# Altium PCB PCB2.pcbdoc (part 1 of 2)
Units mil, origin at the board's own origin, x right, y up, seen from the top; angles counter-clockwise.
Board outline 1968.5 x 1778.5 mil, 4 copper layers (Top Layer, Inner1, Inner2, Bottom Layer), stack 62.447 mil thick; 56 components, 57 nets, 242 pads, 74 vias.
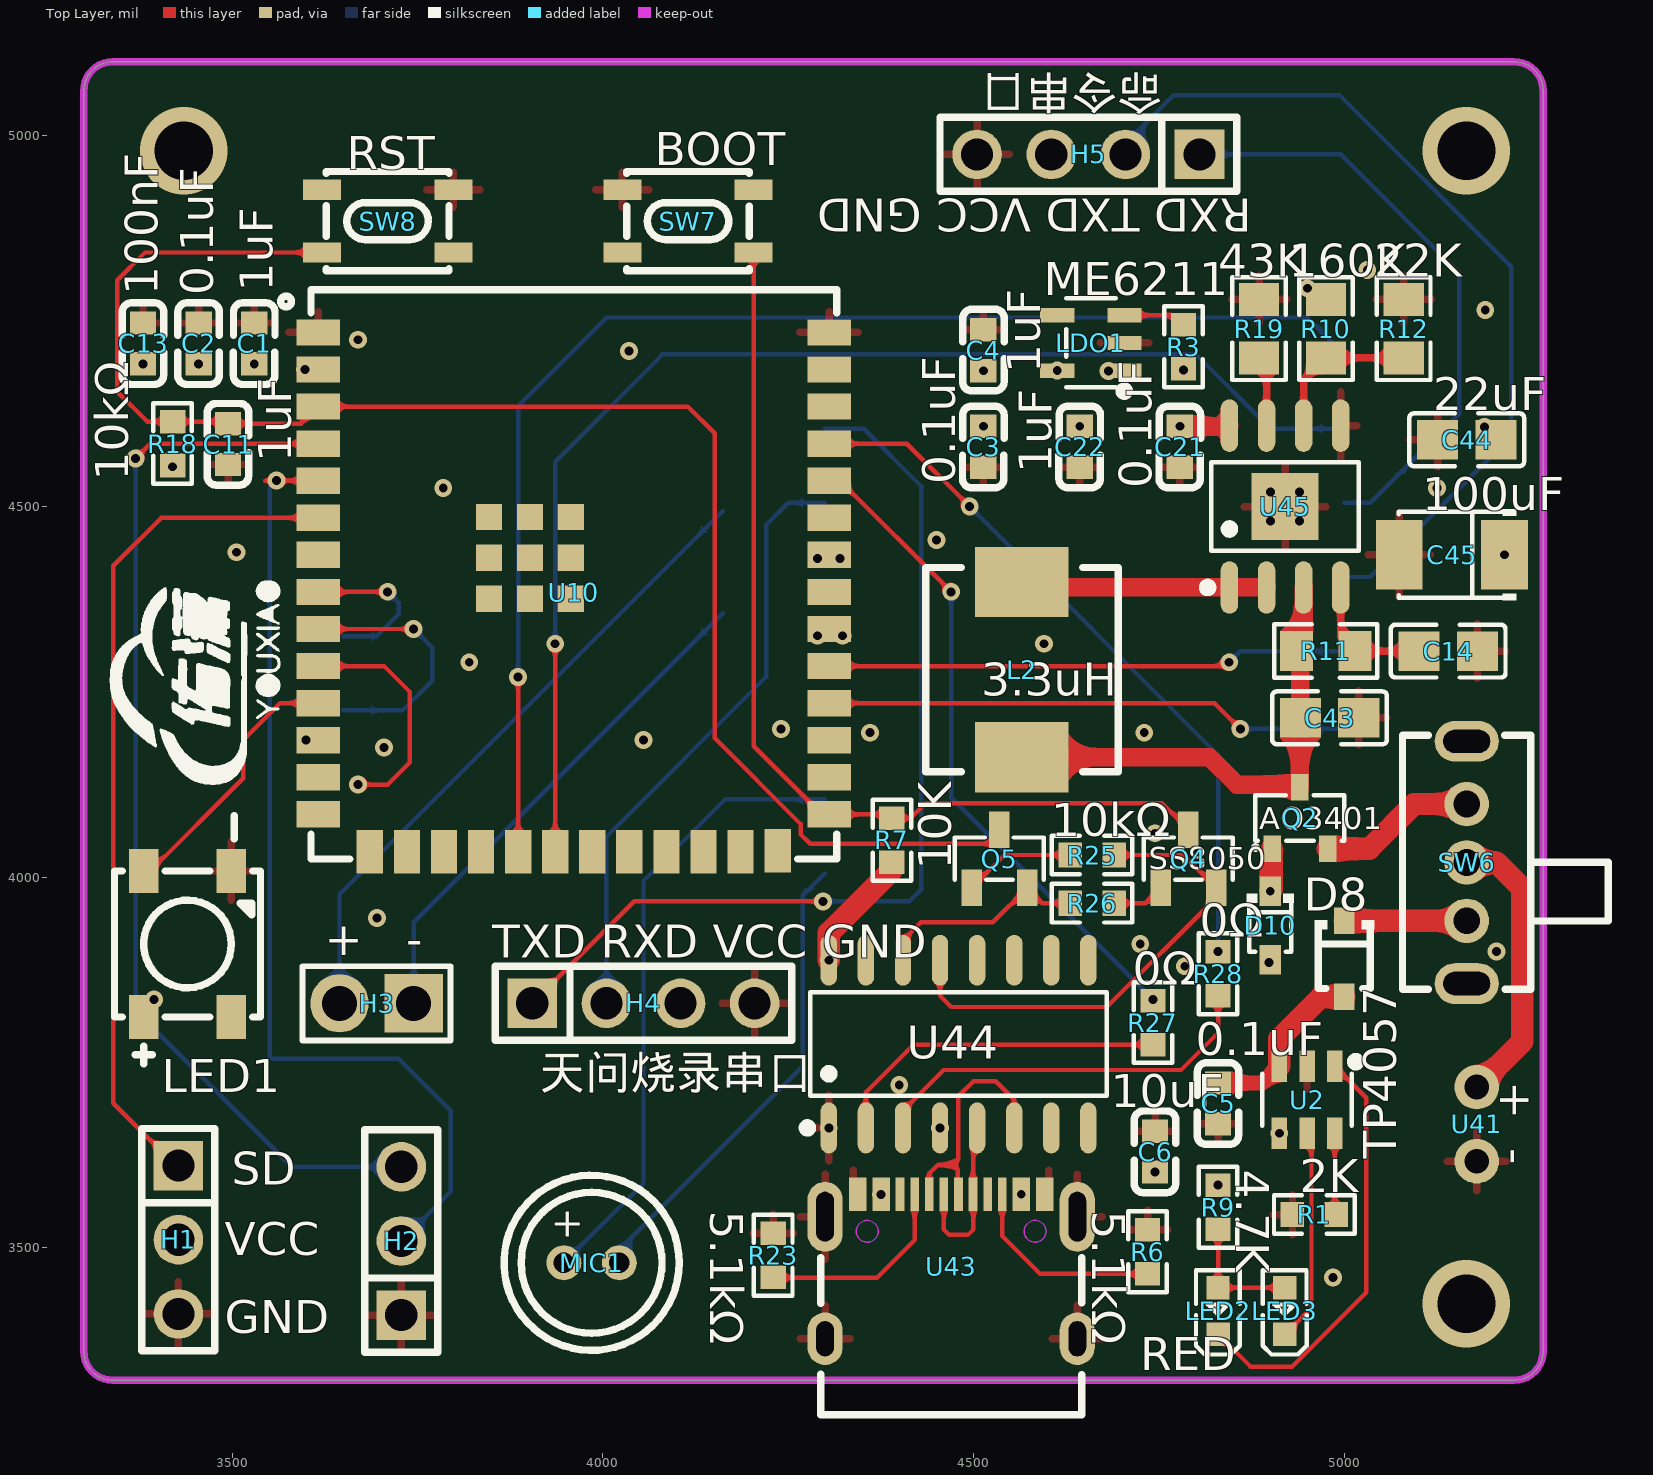
[diagram p0: Top Layer view]
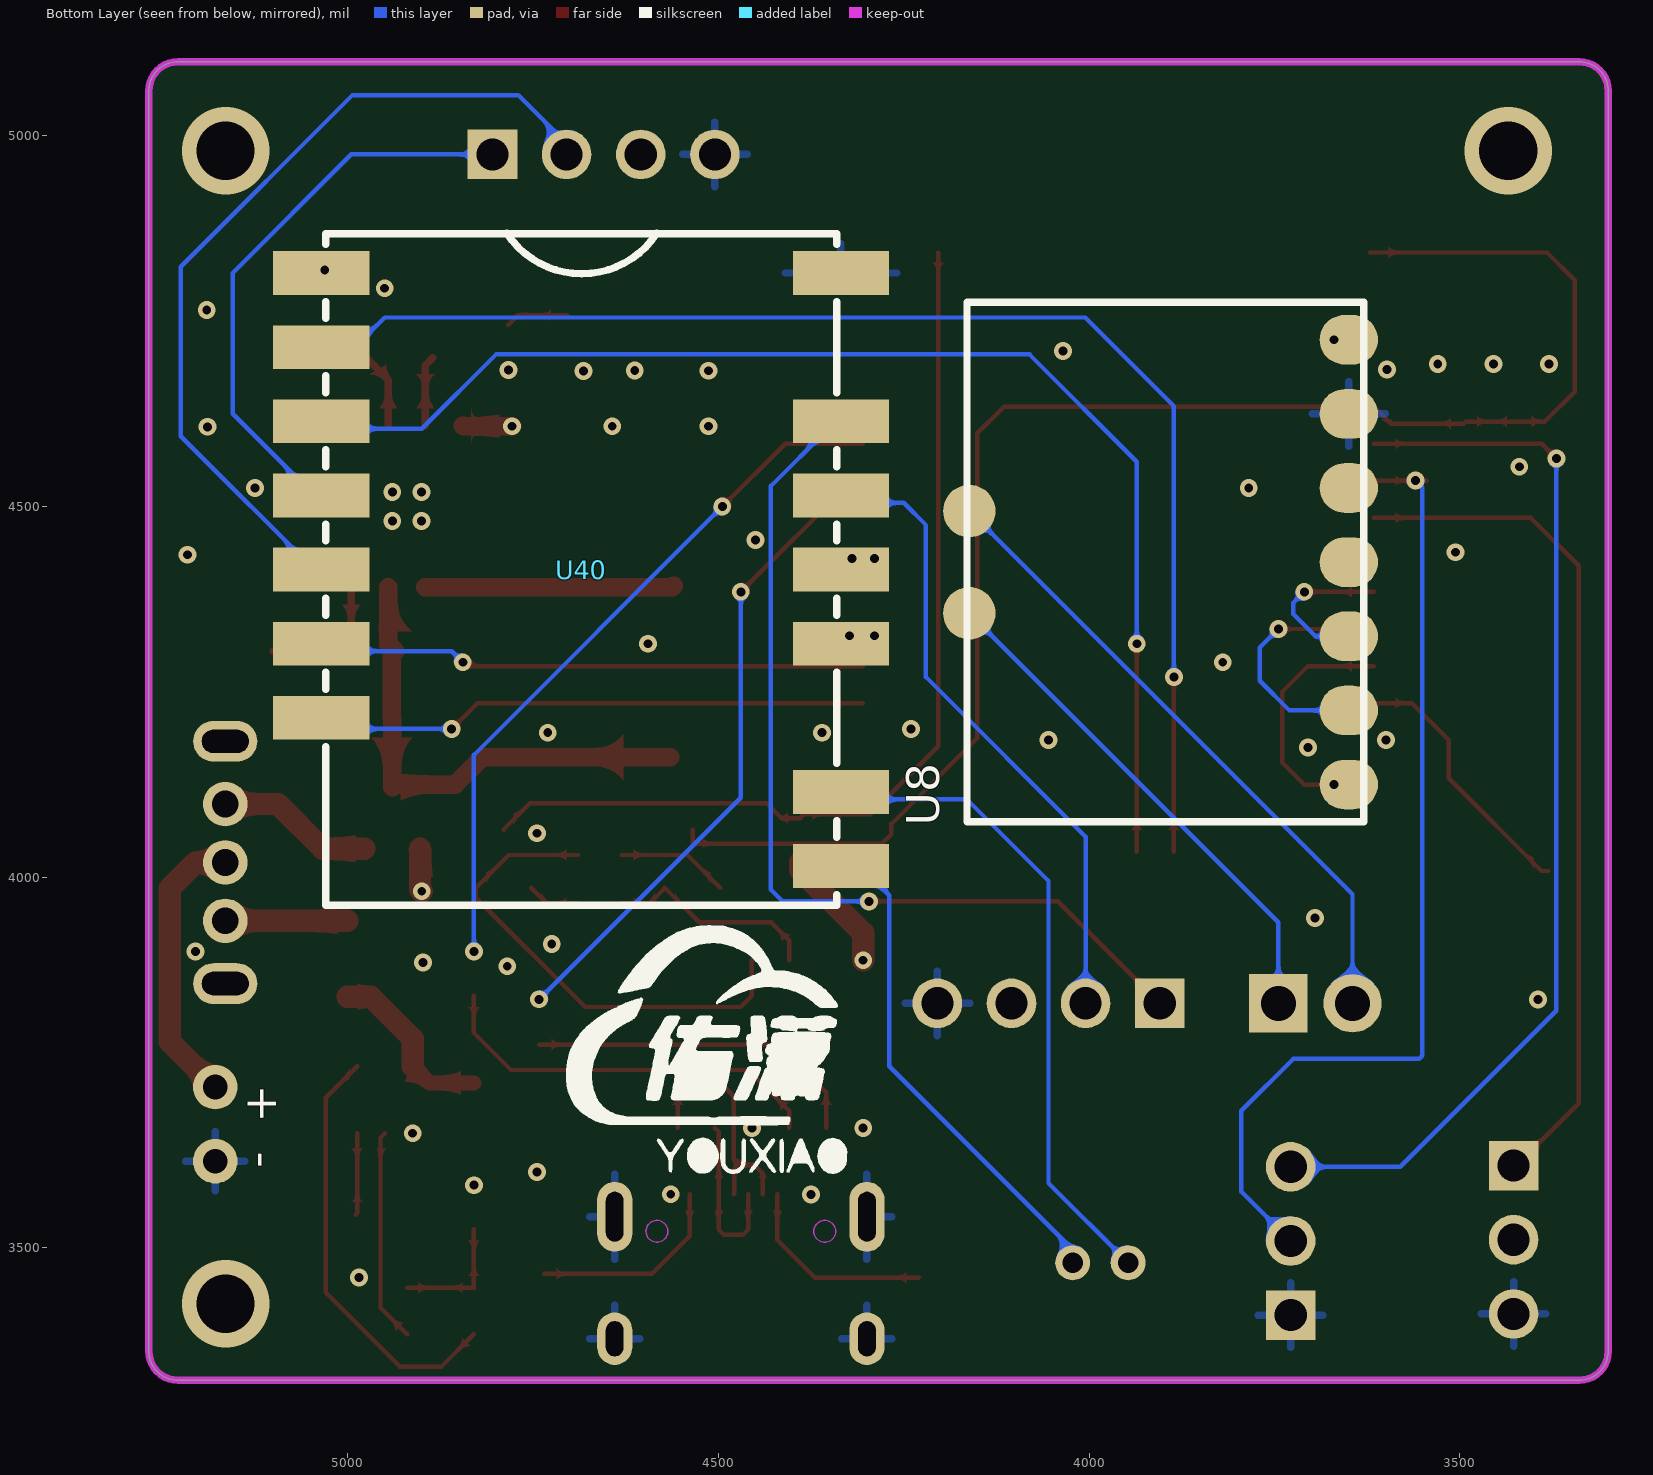
[diagram p1: Bottom Layer view, seen from below]
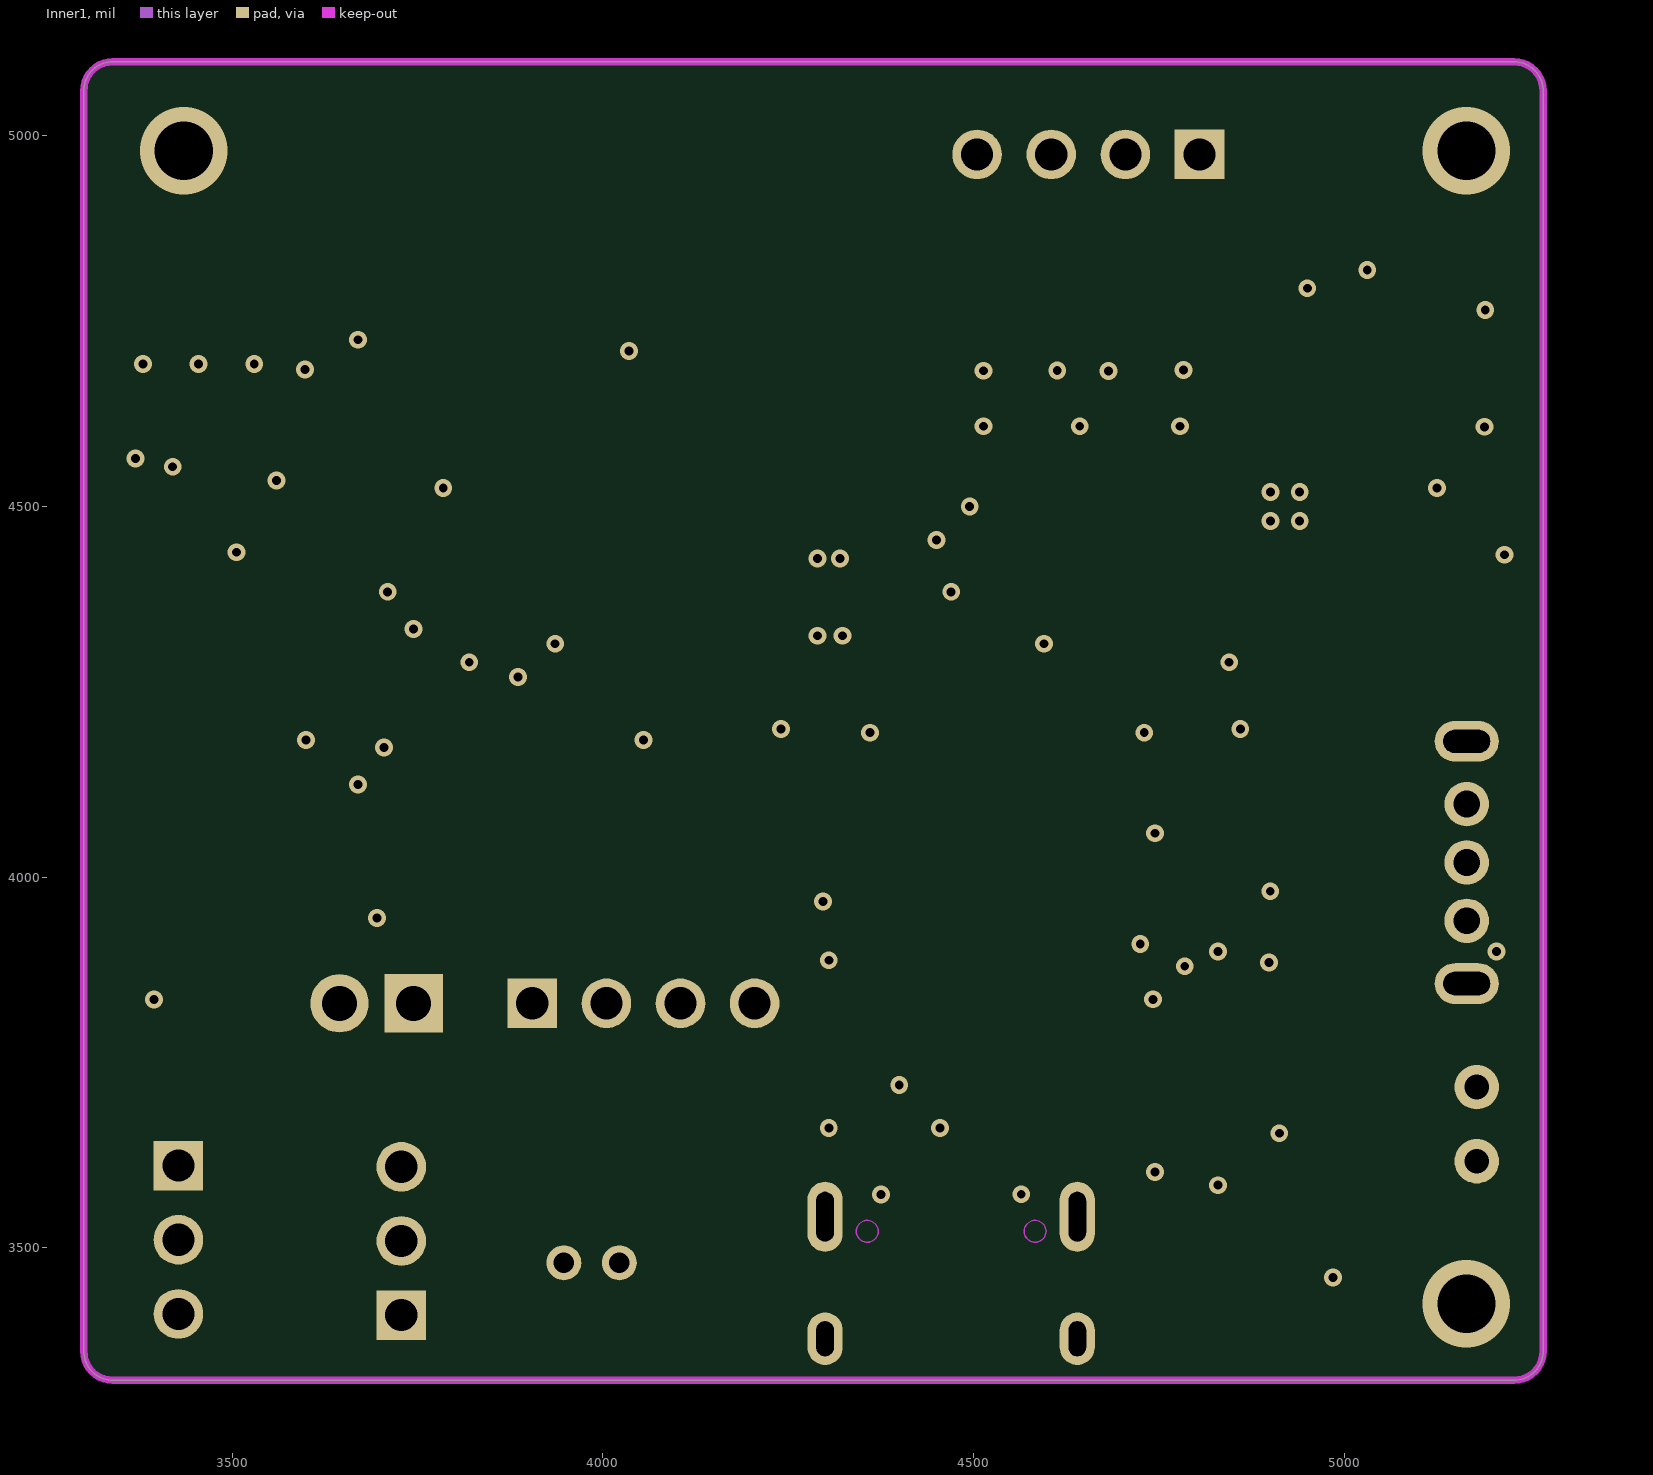
[diagram p2: Inner1]
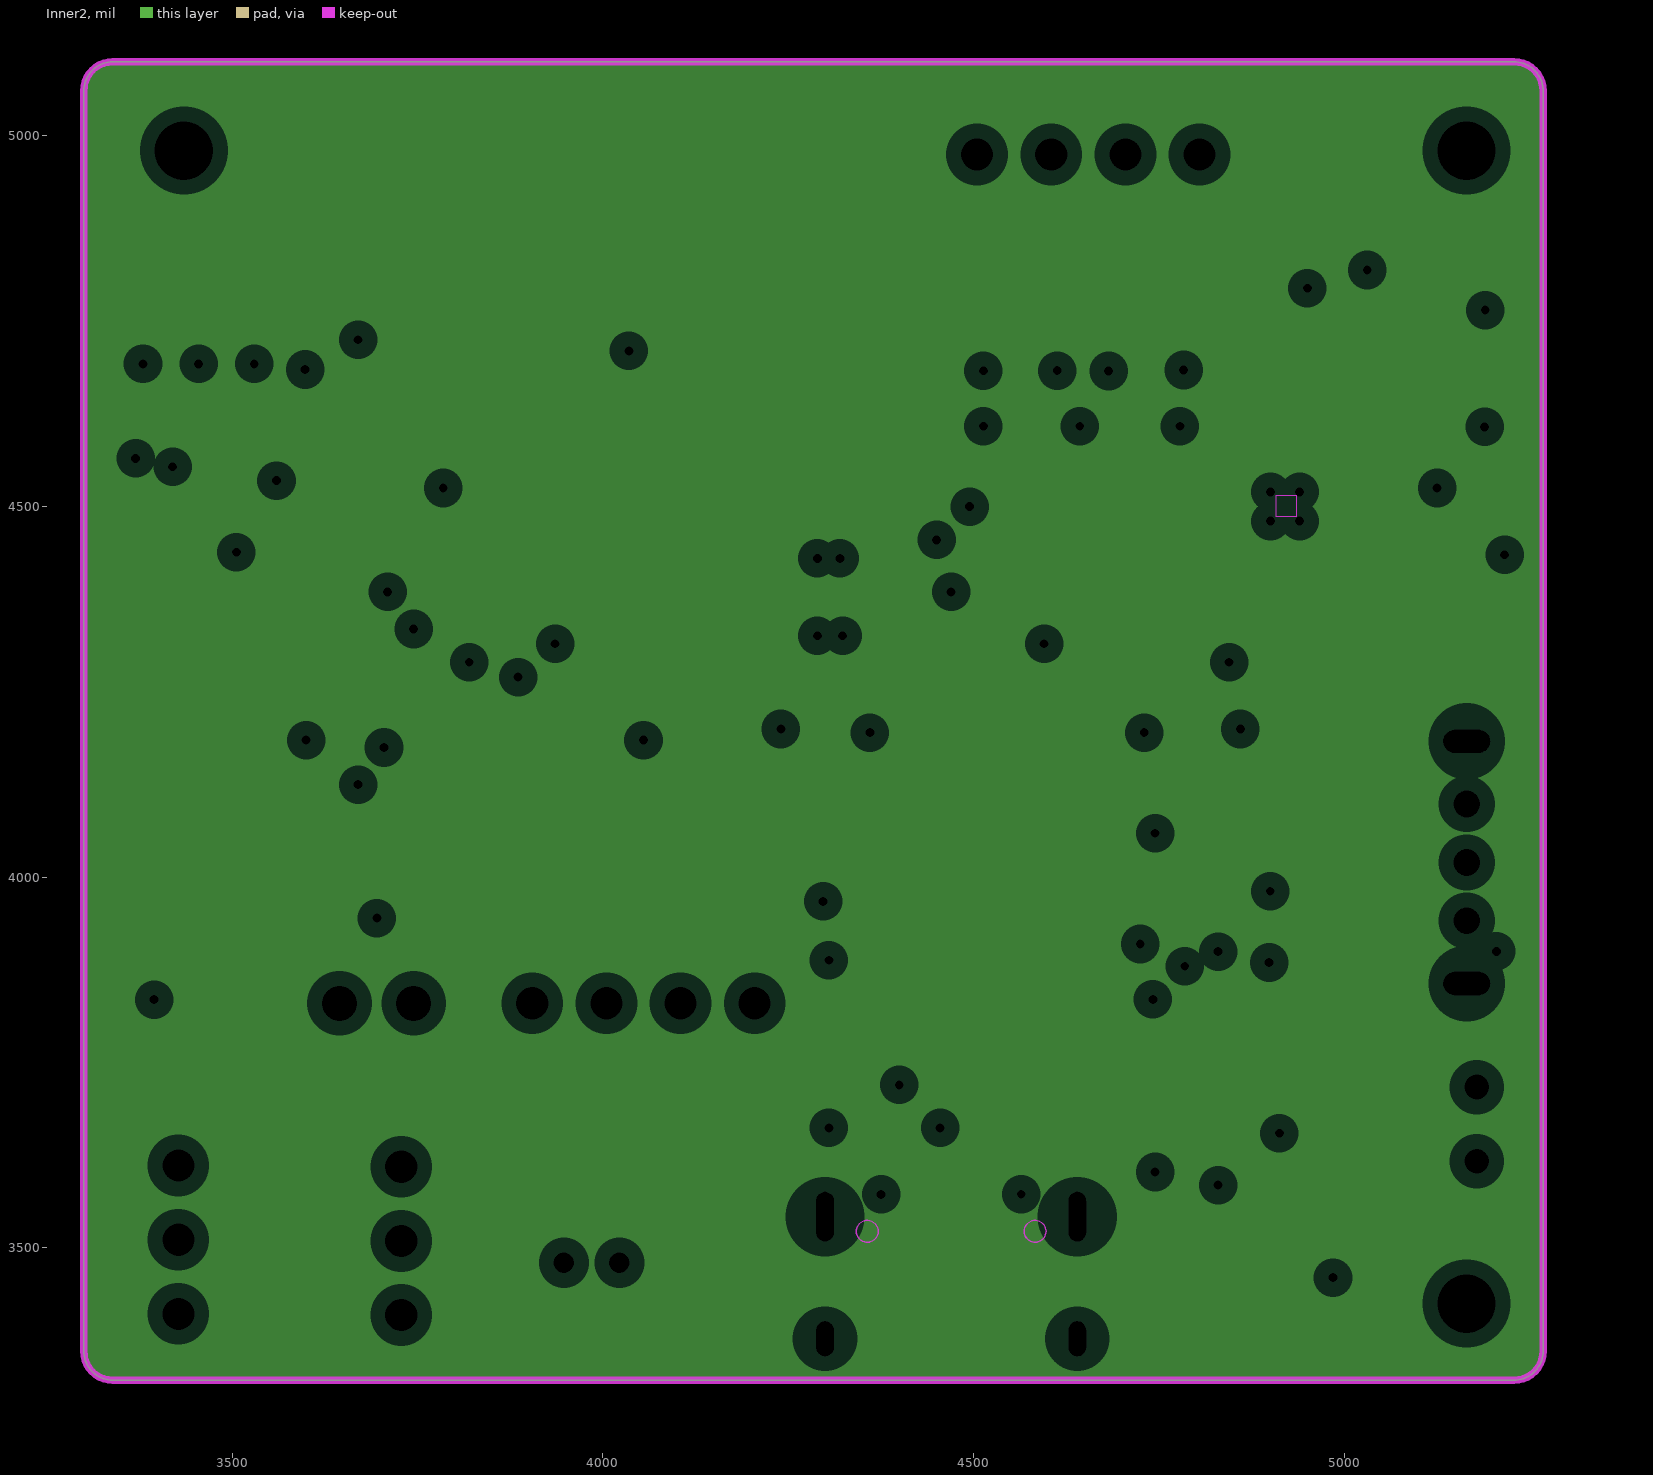
[diagram p3: Inner2, clearances drawn from the general rule]

## Layer stack, top to bottom
Top Layer: signal copper 1.378
Dielectric1: surface 8.283, 7628 RC49% 8.6mil, Dk 0
Inner1: signal copper 0.598
Dielectric2: surface 41.929, 1.1mm H/HOZ Copper, Dk 0
Inner2: plane copper 0.598
Dielectric3: surface 8.283, 7628 RC49% 8.6mil, Dk 0
Bottom Layer: signal copper 1.378

## Board outline
3338.97,5100 5228.73,5100 cw(c5228.73,5060.63) 5268.1,5060.63 5268.1,3360.87 cw(c5228.73,3360.87) 5228.73,3321.5 3338.97,3321.5 cw(c3338.97,3360.87) 3299.6,3360.87 3299.6,5060.63 cw(c3338.97,5060.63)

## Design rules (kind name [scope] priority, off if disabled: settings)
BoardOutlineClearance copperThickness1oz [All] p0: genericclearance=10 ignorepadtopadclearanceinfootprint=FALSE except(0: Arc-SplitContinuation Track-SplitContinuation SMDPad-SplitContinuation THPad-SplitContinuation Via-SplitContinuation Fill-SplitContinuation Poly-SplitContinuation Region-SplitContinuation Text-SplitContinuation)
BoardOutlineClearance copperThickness2oz [All] p0: genericclearance=10 ignorepadtopadclearanceinfootprint=FALSE except(0: Arc-SplitContinuation Track-SplitContinuation SMDPad-SplitContinuation THPad-SplitContinuation Via-SplitContinuation Fill-SplitContinuation Poly-SplitContinuation Region-SplitContinuation Text-SplitContinuation)
BoardOutlineClearance Plane_innerPlane [All] p0: genericclearance=10 ignorepadtopadclearanceinfootprint=FALSE except(0: Arc-SplitContinuation Track-SplitContinuation SMDPad-SplitContinuation THPad-SplitContinuation Via-SplitContinuation Fill-SplitContinuation Poly-SplitContinuation Region-SplitContinuation Text-SplitContinuation)
BoardOutlineClearance Copper_copperRegion [All] p0: genericclearance=10 ignorepadtopadclearanceinfootprint=FALSE except(0: Arc-SplitContinuation Track-SplitContinuation SMDPad-SplitContinuation THPad-SplitContinuation Via-SplitContinuation Fill-SplitContinuation Poly-SplitContinuation Region-SplitContinuation Text-SplitContinuation)
BoardOutlineClearance otherClearance [All] p0: genericclearance=10 ignorepadtopadclearanceinfootprint=FALSE except(0: Arc-SplitContinuation Track-SplitContinuation SMDPad-SplitContinuation THPad-SplitContinuation Via-SplitContinuation Fill-SplitContinuation Poly-SplitContinuation Region-SplitContinuation Text-SplitContinuation)
Clearance copperThickness1oz [All] p1: gap=7 ignorepadtopadclearanceinfootprint=FALSE
Clearance copperThickness2oz [All] p1: gap=7 ignorepadtopadclearanceinfootprint=FALSE
Clearance Plane_innerPlane [All] p1: gap=7 ignorepadtopadclearanceinfootprint=FALSE
Clearance Copper_copperRegion [All] p1: gap=7 ignorepadtopadclearanceinfootprint=FALSE
Clearance otherClearance [All] p1: gap=7 ignorepadtopadclearanceinfootprint=FALSE
DiffPairsRouting differentialPair [All] p1: maxuncoupledlength=10 minlimit=6 maxlimit=Infinity mostfreqgap=6 toplayer_minwidth=5 toplayer_prefwidth=10 toplayer_maxwidth=100 bottomlayer_minwidth=5 bottomlayer_prefwidth=10 bottomlayer_maxwidth=100 midlayer1_minwidth=5 midlayer1_prefwidth=10 midlayer1_maxwidth=100
PasteMaskExpansion pasteMaskExpansion [All] p1: expansion=0
PlaneConnect innerPlane [All] p1: planeconnectstyle=Relief reliefexpansion=20 reliefentries=4 reliefconductorwidth=10 reliefairgap=10
PolygonConnect copperRegion [All] p1: connectstyle=Relief reliefentries=4 reliefconductorwidth=10 polygonreliefangle="90 Angle" airgapwidth=10
RoutingVias viaSize [All] p1: viastyle="Through Hole" holewidth=12.0078 minholewidth=11.811 maxholewidth=248.0314 width=12.0078 minwidth=11.811 maxwidth=248.0314
SolderMaskExpansion solderMaskExpansion [IsVia] p1: useseparateexpansions=TRUE expansion=-1000 expansionbottom=-1000
SolderMaskExpansion solderMaskExpansion [All] p2: useseparateexpansions=TRUE expansion=2 expansionbottom=2
Width copperThickness1oz [All] p1: maxlimit=100 minlimit=5 preferedwidth=10
Width copperThickness2oz [All] p1: maxlimit=100 minlimit=8 preferedwidth=10

## Components (designator, comment, footprint, x,y, rotation, side; value= is the part's Value field where it differs from the comment)
C1 "1uF" C0603#1 3529.61,4720 r90 top
C2 "0.1uF" C0603#1 3454.61,4720 r90 top
C3 "0.1uF" C0603#1 4513.07,4580.7 r90 top
C4 "1uF" C0603#1 4513.07,4710.7 r270 top
C5 "0.1uF" C0603#1 4829.61,3695 r90 top
C6 "10uF" C0603#1 4744.61,3630 r90 top
C11 "1uF" C0603#1 3494.29,4584.32 r90 top
C13 "100nF" C0603#1 3379.61,4720 r90 top
C14 "1uF" C0603#2 5140,4305 r0 top
C21 "0.1uF" C0603#1 4778.07,4580.7 r90 top
C22 "1uF" C0603#1 4643.07,4580.7 r90 top
C43 "1uF" C0603#2 4980,4215 r180 top
C44 "22uF" C0603#2 5165,4590 r0 top
C45 "100uF" CAP-SMD_L3.5-W2.8 5145,4435 r0 top
D8 "1N5819WS" SOD-323_L1.6-W1.3-LS2.7-RD 5000,3890 r270 top
D10 "1N5819WS" SOD-323_L1.8-W1.3-LS2.5-RD 4900,3935 r270 top
H1 "PZ254V-11-03P" HDR-TH_3P-P2.54-V-M 3427.28,3511.12 r270 top
H2 "PZ254V-11-03P" HDR-TH_3P-P2.54-V-M 3727.98,3509.47 r90 top
H3 "PZ254V-11-02P" HDR-TH_2P-P2.54-V-M 3694.61,3830 r180 top
H4 "PZ254V-11-04P" HDR-TH_4P-P2.54-V-M 4054.61,3830 r0 top
H5 "PZ254V-11-04P" HDR-TH_4P-P2.54-V-M 4654.61,4975 r180 top
L2 "3.3uH" IND-SMD_L7.0-W6.6 4565,4280 r90 top
LDO1 "ME6211" SOT-23-5_L3.0-W1.7-P0.95-LS2.8-BL 4658.07,4720.7 r90 top
LED1 "XL-5050RGBC-WS2812B" LED-SMD_4P-L5.0-W5.0-BL_XL-5050RGBC 3439.61,3910 r0 top
LED2 "RED" LED0603-RD_RED 4829.61,3415 r90 top
LED3 "NCD0603R1" LED0603-RD_RED 4919.61,3415 r90 top
MIC1 "GMI6050P-36db" MIC-TH_BD6.0-P1.90-D0.4-L-FD_GMI6050P-2CXXDB 3984.61,3480 r0 top
Q2 "AO3401" SOT-23-3_L2.9-W1.4-P1.90-LS2.6-BR 4940,4080 r270 top
Q4 "SS8050" SOT-23-3_L2.9-W1.3-P1.90-LS2.4-BR 4789.61,4025 r270 top
Q5 "SS8050" SOT-23-3_L2.9-W1.3-P1.90-LS2.4-BR 4534.61,4025 r270 top
R1 "2K" R0603#1 4959.61,3545 r0 top
R3 "5.1K" R0603#1 4783.07,4715.7 r90 top
R6 "5.1kΩ" R0603#1 4734.61,3495 r90 top
R7 "10K" R0603#1 4389.61,4050 r270 top
R9 "4.7K" R0603#1 4829.61,3555 r90 top
R10 "160K" R0603#2 4975,4740 r90 top
R11 "10kΩ" R0603#2 4975,4305 r180 top
R12 "22K" R0603#2 5080,4740 r90 top
R18 "10kΩ" R0603#1 3419.61,4585 r270 top
R19 "43K" R0603#2 4885,4740 r90 top
R23 "5.1kΩ" R0603#1 4229.61,3490 r270 top
R25 "10kΩ" R0603#1 4659.61,4030 r0 top
R26 "10kΩ" R0603#1 4659.61,3965 r180 top
R27 "0Ω" R0603#1 4741.69,3804.04 r90 top
R28 "0Ω" R0603#1 4829.61,3870 r90 top
SW6 "SK12D07VG4" SW-TH_SK12D07VG4 5165,4020 r90 top
SW7 "TS-KG89S-AT25F" SW-SMD_4P-L4.2-W3.3-P2.15-LS5.1 4114.61,4885 r180 top
SW8 "TS-KG89S-AT25F" SW-SMD_4P-L4.2-W3.3-P2.15-LS5.1 3709.61,4885 r0 top
U2 "TP4057" SOT-23-6_L2.9-W1.6-P0.95-LS2.8-BL 4949.61,3700 r180 top
U8 "" MAX98357moudle 4009.61,4425 r90 bottom
U10 "ESP32-S3-WROOM-1U-N16R8" WIRELM-SMD_ESP32-S3-WROOM-1U 3960.55,4384.65 r0 top
U40 "ASRPRO-core" COMM-SMD_ASRPRO-CORE-V1.1 4685,4415 r180 bottom
U41 "" 1*2-2.54单排针 5178.51,3717 r270 top
U43 "24018-UCAF001-A" TYPE-C-USB-SMD_CF003 4469.61,3475 r0 top
U44 "CH340C" SOP-16_L10.0-W3.9-P1.27-LS6.0-BL 4479.61,3775 r0 top
U45 "FP6276BXR-G1" SOP-8_L4.9-W3.9-P1.27-LS6.0-BL-EP 4920,4500 r0 top

## Footprints (in the part's own frame and the unit in brackets; to place one, negate y for a bottom-side part, rotate by r counter-clockwise, add the part's x,y. Pads: shape width x height; smd on the part's side, far side on the other; paste and mask are expansions set on the pad)
1*2-2.54单排针 [mil]
  round 60 hole 33.46: 1(0,0) 2(100,0)
C0603#1 [mm]
  rect 0.8x0.9 smd: 1(-0.7,0) 2(0.7,0)
  silkscreen extent -1.41,-0.71 1.39,0.72
C0603#2 [mm]
  rect 1.41x1.35 smd paste-100 mask+0.051: 1(-1,0) 2(1,0)
  silkscreen extent -1.96,-0.9 1.96,0.9
CAP-SMD_L3.5-W2.8 [mil]
  rect 63.29x93.54 smd: 1(71.02,0) 2(-71.02,0)
  silkscreen extent -72,-61 87,61
COMM-SMD_ASRPRO-CORE-V1.1 [mm]
  rect 3.3x1.5 smd: 1(-8.9,10.16) 2(-8.9,7.62) 3(-8.9,5.08) 4(-8.9,2.54) 5(-8.9,0) 6(-8.9,-2.54) 7(-8.9,-5.08) 10(8.9,-10.16) 11(8.9,-7.62) 13(8.9,-2.54) 14(8.9,0) 15(8.9,2.54) 16(8.9,5.08) 18(8.9,10.16)
  silkscreen extent -8.75,-11.5 8.75,11.52
HDR-TH_2P-P2.54-V-M [mm]
  rect 2x2 hole 1.2: 1(-1.27,0)
  round 2 hole 1.2: 2(1.27,0)
  silkscreen extent -2.54,-1.27 2.54,1.27
HDR-TH_3P-P2.54-V-M [mm]
  rect 1.7x1.7 hole 1.1: 1(-2.54,0)
  round 1.7 hole 1.1: 2(0,0) 3(2.54,0)
  silkscreen extent -3.81,-1.25 3.81,1.25
HDR-TH_4P-P2.54-V-M [mm]
  rect 1.7x1.7 hole 1.1: 1(-3.81,0)
  round 1.7 hole 1.1: 2(-1.27,0) 3(1.27,0) 4(3.81,0)
  silkscreen extent -5.08,-1.27 5.08,1.27
IND-SMD_L7.0-W6.6 [mm]
  rect 2.4x3.2 smd: 1(-3,0) 2(3,0)
  silkscreen extent -3.5,-3.3 3.5,3.3
LED0603-RD_RED [mm]
  rect 0.8x0.8 smd: 1(-0.8,-0.003) 2(0.8,0.003)
  silkscreen extent -1.49,-0.75 1.39,0.76
LED-SMD_4P-L5.0-W5.0-BL_XL-5050RGBC [mm]
  rect 1x1.5 smd: 1(-1.5,-2.5) 2(1.5,-2.5) 3(1.5,2.5) 4(-1.5,2.5)
  silkscreen extent -2.5,-4.1 2.5,4.4
MAX98357moudle [mm]
  oval 1.7x2 smd: 1(-7.62,-9.144) 2(-5.08,-9.144) 3(-2.54,-9.144) 4(0,-9.144) 5(2.54,-9.144) 6(5.08,-9.144) 7(7.62,-9.144)
  round 1.8 smd: 8(-1.75,3.856) 9(1.75,3.856)
  silkscreen extent -8.9,-9.66 8.9,3.94
MIC-TH_BD6.0-P1.90-D0.4-L-FD_GMI6050P-2CXXDB [mm]
  round 1.2 hole 0.7: 1(-0.95,0) 2(0.95,0)
  silkscreen extent -3,-3 3,3
R0603#1 [mil]
  rect 31.75x34.02 smd paste-3937.01 mask+2: 1(-29.66,0) 2(29.66,0)
  silkscreen extent -55,-26 55,26
R0603#2 [mil]
  rect 44.59x54.21 smd paste-3937.01 mask+2: 1(-39.37,0) 2(39.37,0)
  silkscreen extent -69,-36 69,36
SOD-323_L1.6-W1.3-LS2.7-RD [mm]
  rect 0.9x0.7 smd paste+0 mask+0.05: 1(-1.3,0) 2(1.3,0)
  silkscreen extent -1.32,-1.02 1.02,1.02
SOD-323_L1.8-W1.3-LS2.5-RD [mm]
  rect 1x0.75 smd: 1(-1.173,0) 2(1.173,0)
  silkscreen extent -1.08,-0.8 0.9,0.8
SOP-8_L4.9-W3.9-P1.27-LS6.0-BL-EP [mm]
  oval 0.6x1.8 smd: 1(-1.905,-2.772) 2(-0.635,-2.772) 3(0.635,-2.772) 4(1.905,-2.772) 5(1.905,2.772) 6(0.635,2.772) 7(-0.635,2.772) 8(-1.905,2.772)
  rect 2.29x2.29 smd: 9(0,0)
  silkscreen extent -2.8,-2.92 2.53,1.52
SOP-16_L10.0-W3.9-P1.27-LS6.0-BL [mm]
  oval 0.56x1.745 smd paste+0 mask+0.051: 1(-4.445,-2.872) 2(-3.175,-2.872) 3(-1.905,-2.872) 4(-0.635,-2.872) 5(0.635,-2.872) 6(1.905,-2.872) 7(3.175,-2.872) 8(4.445,-2.872) 9(4.445,2.872) 10(3.175,2.872) 11(1.905,2.872) 12(0.635,2.872) 13(-0.635,2.872) 14(-1.905,2.872) 15(-3.175,2.872) 16(-4.445,2.872)
  silkscreen extent -5.33,-3.02 5.08,1.77
SOT-23-3_L2.9-W1.3-P1.90-LS2.4-BR [mm]
  rect 1.25x0.7 smd: 1(1,-0.95) 2(1,0.95) 3(-1,0)
  silkscreen extent -0.73,-1.53 0.73,1.53
SOT-23-3_L2.9-W1.4-P1.90-LS2.6-BR [mm]
  rect 0.91x0.6 smd: 1(1.055,-0.955) 2(1.055,0.955) 3(-1.055,0)
  silkscreen extent -0.78,-1.6 1.09,1.53
SOT-23-5_L3.0-W1.7-P0.95-LS2.8-BL [mm]
  rect 0.49x1.157 smd: 1(-0.95,-1.154) 2(0,-1.154) 3(0.95,-1.154)
  rect 0.49x1.175 smd: 4(0.95,1.154) 5(-0.95,1.154)
  silkscreen extent -1.8,-1.29 1.53,0.85
SOT-23-6_L2.9-W1.6-P0.95-LS2.8-BL [mil]
  rect 20.95x42.2 smd: 1(-37.4,-45.24) 2(0,-45.24) 3(37.4,-45.24) 4(37.4,45.24) 5(0,45.24) 6(-37.4,45.24)
  silkscreen extent -72,-57 61,35
SW-SMD_4P-L4.2-W3.3-P2.15-LS5.1 [mm]
  rect 1.3x0.7 smd: 1(-2.25,1.075) 2(2.25,1.075) 3(-2.25,-1.075) 4(2.25,-1.075)
  silkscreen extent -2.1,-1.7 2.1,1.7
SW-TH_SK12D07VG4 [mil]
  round 60 hole 36 paste+0 mask+1.97: 1(-78.74,0) 2(0,0) 3(78.74,0)
  oval 55.12x86.61 hole 31.5 slot 62.99 at 90 deg paste+0 mask+1.97: 4(163.38,0) 5(-163.39,0)
  silkscreen extent -171,-191 171,87
TYPE-C-USB-SMD_CF003 [mm]
  oval 1.2x2.4 hole 0.6 slot 1.7 at 90 deg paste+0 mask+0.05: 17(4.32,1.705) 20(-4.32,1.705)
  oval 1.2x1.8 hole 0.6 slot 1.2 at 90 deg paste+0 mask+0.05: 18(4.32,-2.475) 19(-4.32,-2.475)
  rect 0.3x1.14 smd paste-100 mask+0.05: A1(-3.35,2.474) A4(-2.55,2.471) A5(-1.25,2.475) A6(-0.25,2.475) A7(0.25,2.474) A8(1.25,2.475) A9(2.55,2.475) A12(3.35,2.475) B1(3.05,2.475) B4(2.25,2.475) B5(1.75,2.475) B6(0.75,2.475) B7(-0.75,2.474) B8(-1.75,2.475) B9(-2.25,2.471) B12(-3.05,2.474)
  Board Outline Layer circle w0.003: c-2.875,1.205 r0.375
  Board Outline Layer circle w0.003: c2.875,1.205 r0.375
  Board Outline Layer region: -2.5,1.205 -2.537,1.042 -2.641,0.912 -2.792,0.839 -2.958,0.839 -3.109,0.912 -3.213,1.042 -3.25,1.205 -3.25,1.205 -3.213,1.368 -3.109,1.498 -2.958,1.571 -2.792,1.571 -2.641,1.498 -2.537,1.368 -2.5,1.205
  Board Outline Layer region: -2.5,1.205 -2.537,1.042 -2.641,0.912 -2.792,0.839 -2.958,0.839 -3.109,0.912 -3.213,1.042 -3.25,1.205 -3.25,1.205 -3.213,1.368 -3.109,1.498 -2.958,1.571 -2.792,1.571 -2.641,1.498 -2.537,1.368 -2.5,1.205
  Board Outline Layer region: 3.25,1.205 3.213,1.042 3.109,0.912 2.958,0.839 2.792,0.839 2.641,0.912 2.537,1.042 2.5,1.205 2.5,1.205 2.537,1.368 2.641,1.498 2.792,1.571 2.958,1.571 3.109,1.498 3.213,1.368 3.25,1.205
  Board Outline Layer region: 3.25,1.205 3.213,1.042 3.109,0.912 2.958,0.839 2.792,0.839 2.641,0.912 2.537,1.042 2.5,1.205 2.5,1.205 2.537,1.368 2.641,1.498 2.792,1.571 2.958,1.571 3.109,1.498 3.213,1.368 3.25,1.205
  silkscreen extent -4.47,-5.07 4.47,0.3
WIRELM-SMD_ESP32-S3-WROOM-1U [mm]
  rect 1.5x0.9 smd paste+0 mask+0.05: 1(-8.75,8.895) 2(-8.75,7.625) 3(-8.75,6.355) 4(-8.75,5.085) 5(-8.75,3.815) 6(-8.75,2.545) 7(-8.75,1.275) 8(-8.75,0.005) 9(-8.75,-1.265) 10(-8.75,-2.535) 11(-8.75,-3.805) 12(-8.75,-5.075) 13(-8.75,-6.345) 14(-8.75,-7.615) 27(8.75,-7.615) 28(8.75,-6.345) 29(8.75,-5.075) 30(8.75,-3.805) 31(8.75,-2.535) 32(8.75,-1.265) 33(8.75,0.005) 34(8.75,1.275) 35(8.75,2.545) 36(8.75,3.815) 37(8.75,5.085) 38(8.75,6.355) 39(8.75,7.625) 40(8.75,8.895)
  rect 0.9x1.5 smd paste+0 mask+0.05: 15(-6.985,-8.895) 16(-5.715,-8.895) 17(-4.445,-8.895) 18(-3.175,-8.895) 19(-1.905,-8.895) 20(-0.635,-8.895) 21(0.635,-8.895) 22(1.905,-8.895) 23(3.175,-8.895) 24(4.445,-8.895) 25(5.715,-8.895) 26(6.985,-8.865)
  rect 0.9x0.9 smd: 41(-2.9,-0.225) 41(-2.9,1.175) 41(-2.9,2.575) 41(-1.5,-0.225) 41(-1.5,1.175) 41(-1.5,2.575) 41(-0.1,-0.225) 41(-0.1,1.175) 41(-0.1,2.575)
  silkscreen extent -10.04,-9.14 9.02,10.36

## Via types
v1: diameter 24.02, hole 12.01, Top Layer to Bottom Layer, 67 vias
v2: diameter 24, hole 12, Top Layer to Bottom Layer, 4 vias
v3: diameter 118.11, hole 78.74, Top Layer to Bottom Layer, 3 vias

## Nets (pads, with @x,y where several pads share a name; then routed paths per layer and width w, separated by ;. In a path a pad name is that pad's centre, name@x,y a point inside that pad or via, vN(x,y) a via of type N, cw(c..) or ccw(c..) an arc to the next point about the centre after c; other vN are vias at no path point)
3.3V: C1.1 C2.1 C3.2 C4.2 C13.1 H1.2 H4.3 H5.3 LDO1.5 R7.2 R18.2 U10.2 U10.12 U40.1 U44.4 U44.16 | length 167.5
  Top Layer w30: v1(4304.61,3888.09) 4304.61,3925 4389.61,4010 R7.2@4389.61,4020.34
  other v1: 4454.61,3661.91 3599.61,4185 3419.61,4553.7 4513.07,4608.26 4513.07,4683.14 4612.65,4683.3 3598.2,4684.85 3379.61,4692.44 3454.61,4692.44 3529.61,4692.44 5030.87,4819.01
3.7V: C43.2 L2.1 Q2.3 R11.2 U45.3 | length 667.2
  Top Layer w25: L2.1@4565,4161.89 4818.11,4161.89 4855,4125 4936.54,4125 Q2.3@4940,4121.54 4940,4214.37 C43.2@4940.63,4215 4940.63,4300 R11.2@4935.63,4305 4945,4314.37 U45.3@4945,4390.85
5V: C21.2 C22.2 C44.2 C45.1 D10.1 LDO1.1 LED1.1 Q2.1 R3.1 R10.2 U8.7 U45.8 | length 125.6
  Top Layer w25: v1(4778.07,4608.26) 4844.11,4608.26 U45.8@4845,4609.15
  Top Layer w30: v1(4900,3981.16) 4902.4,3983.57 Q2.1@4902.4,4038.46
  other v1: 3394.61,3835 5216.02,4435 4643.07,4608.26 5189.09,4607.55 4681.89,4682.79 4783.07,4684.21 3669.61,4725 4950,4794.37
$1N2384: U10.35
$1N2394: U10.29
$1N2397: U10.33
$1N2420: U10.28
$1N4031: H3.1 U8.8 | length 698.8
  Bottom Layer w6: H3.1@3744.61,3830 3744.61,3939.29 U8.8@4161.42,4356.1
$1N4036: H3.2 U8.9 | length 878
  Bottom Layer w6: H3.2@3644.61,3830 3644.61,3977.09 U8.9@4161.42,4493.9
$1N4911: R1.2 U2.6 | length 110.7
  Top Layer w6: U2.6@4987.01,3654.76 4987.01,3547.26 R1.2@4989.27,3545
$1N4920: LED2.2 LED3.2 R9.1 | length 168.9
  Top Layer w6: R9.1@4829.61,3525.34 4829.61,3446.61 LED2.2@4829.47,3446.48 LED3.2@4919.47,3446.48
$1N5755: LDO1.3 R3.2 | length 84.9
  Top Layer w6: LDO1.3@4703.49,4758.1 4770.33,4758.1 R3.2@4783.07,4745.36
$1N5993: MIC1.2 U40.10 | length 639.8
  Bottom Layer w6: MIC1.2@4022.01,3480 4022.01,3497.4 4269.61,3745 4269.61,3975.39 U40.10@4299.22,4005
$1N5998: MIC1.1 U40.11 | length 849.7
  Bottom Layer w6: MIC1.1@3947.21,3480 4054.61,3587.4 4054.61,3995 4164.61,4105 U40.11@4299.22,4105
$1N17680: R6.1 U43.B5 | length 273.7
  Top Layer w6: U43.B5@4538.51,3572.44 4538.51,3516.1 4589.61,3465 4734.27,3465 R6.1@4734.61,3465.34
$1N17681: R23.2 U43.A5 | length 273.6
  Top Layer w6: R23.2@4229.61,3460.34 4229.95,3460 4369.61,3460 4420.4,3510.79 U43.A5@4420.4,3572.44
$1N18254: R27.1 U44.2 | length 461.8
  Top Layer w6: U44.2@4354.61,3661.91 4354.61,3710 4418.99,3774.38 R27.1@4741.69,3774.38
$1N18255: R28.1 U44.3 | length 541.9
  Top Layer w6: U44.3@4404.61,3661.91 4404.61,3685 4459.61,3740 4779.61,3740 4829.61,3790 R28.1@4829.61,3840.34
$1N18267: Q4.1 R26.1 | length 71.5
  Top Layer w6: R26.1@4689.27,3965 4731.58,3965 Q4.1@4752.21,3985.63
$1N18268: Q5.1 R25.1 | length 151.1
  Top Layer w6: Q5.1@4497.21,3985.63 4541.58,4030 R25.1@4629.95,4030
$1N22811: D8.1 SW6.1 | length 165
  Top Layer w30: D8.1@5000,3941.18 5164.92,3941.18 SW6.1@5165,3941.26
$1N25043: C14.1 R11.1 U45.4 | length 180.1
  Top Layer w10: U45.4@4995,4390.85 4995,4324.37 R11.1@5014.37,4305 C14.1@5100.63,4305
$1N25045: L2.2 U45.1 U45.2 | length 335.9
  Top Layer w25: L2.2@4560,4393.11 4562.26,4390.85 U45.1@4845,4390.85 U45.2@4895,4390.85
$1N25046: R19.1 U45.7 | length 95.6
  Top Layer w10: R19.1@4885,4700.63 4895,4690.63 U45.7@4895,4609.15
$1N25048: R10.1 R12.1 U45.6 | length 208.9
  Top Layer w10: U45.6@4945,4609.15 4945,4670.63 R10.1@4975,4700.63 R12.1@5080,4700.63
A1: U10.34 U40.14
  other v1: 4289.29,4430 4319.61,4430
A2: U10.32 U40.13
  other v1: 4289.29,4325.75 4323.1,4325.75
A3: U10.31 U40.6 | length 703.3
  Top Layer w6: U10.31@4305.04,4284.85 4839.46,4284.85 v1(4844.61,4290)
  Bottom Layer w6: v1(4844.61,4290) 4859.61,4305 U40.6@5000,4305
A4: U10.30 U40.7 | length 711.5
  Top Layer w6: U10.30@4305.04,4234.85 4824.76,4234.85 v1(4859.61,4200)
  Bottom Layer w6: v1(4859.61,4200) 4995,4200 U40.7@5000,4205
AS-RXD: H4.2 U40.15 | length 825.9
  Bottom Layer w6: H4.2@4004.61,3830 4004.61,4054.61 4220,4270 4220,4475 4250,4505 U40.15@4299.22,4505
AS-TXD: H4.1 U40.16 | length 1294.3
  Top Layer w6: H4.1@3904.61,3830 4042.09,3967.48 v1(4296.95,3967.48)
  Bottom Layer w6: v1(4296.95,3967.48) 4413.48,3967.48 4429.01,3983.01 4429.01,4527.8 4351.8,4605 U40.16@4299.22,4605
BAT: C5.2 D8.2 U2.3 | length 240.2
  Top Layer w20: C5.2@4829.61,3722.56 4889.53,3722.56 U2.3@4912.21,3745.24
  Top Layer w30: U2.3@4912.21,3745.24 4912.21,3782.21 4968.82,3838.82 D8.2@5000,3838.82
BCLK: U8.2 U10.9 | length 345.3
  Top Layer w6: U10.9@3616.06,4334.85 v1(3744.61,4334.85)
  Bottom Layer w6: U8.2@3649.61,4225 3729.61,4225 3769.61,4265 3769.61,4309.85 v1(3744.61,4334.85)
CAT-RXD: H5.1 U40.4 | length 811.4
  Bottom Layer w6: H5.1@4804.61,4975 4995,4975 5155,4815 5155,4625 5035,4505 U40.4@5000,4505
CAT-TXD: H5.2 U40.5 | length 1190.1
  Bottom Layer w6: H5.2@4704.61,4975 4704.61,4989.61 4770,5055 4993.39,5055 5225,4823.39 5225,4595 5035,4405 U40.5@5000,4405
CHRG: LED2.1 U2.1 | length 582.2
  Top Layer w6: LED2.1@4829.74,3383.52 4873.26,3340 4929.61,3340 5029.61,3440 5029.61,3702.64 U2.1@4987.01,3745.24
DIN: U8.3 U10.8 | length 217.3
  Top Layer w6: U10.8@3616.06,4384.85 3709.46,4384.85 v1(3709.61,4385)
  Bottom Layer w6: U8.3@3649.61,4325 3694.61,4325 3724.61,4355 3724.61,4370 v1(3709.61,4385)
DTR: Q4.2 R25.2 U44.13 | length 657.1
  Top Layer w6: U44.13@4454.61,3888.09 4454.61,3840 4469.61,3825 4679.61,3825 4827.01,3972.4 Q4.2@4827.01,3985.63 4782.64,4030 R25.2@4689.27,4030
ELEC: SW6.2 U41.1 | length 383
  Top Layer w30: SW6.2@5165,4020 5205,4020 5240,3985 5240,3778.49 U41.1@5178.51,3717
GND: C1.2 C2.2 C3.1 C4.1 C5.1 C6.2 C11.1 C13.2 C14.2 C21.1 C22.1 C43.1 C44.1 C45.2 H1.3 H2.1 H4.4 H5.4 LDO1.2 LED1.3 R1.1 R6.2 R12.2 R19.2 R23.1 SW7.4 SW8.2 U2.2 U8.6 U10.1 U10.40 U40.18 U41.2 U43.17 U43.18 U43.19 U43.20 U43.A1 U43.A12 U43.B1 U43.B12 U44.1 U45.5 U45.9
  other v1: 4984.61,3460 4304.61,3661.91 4399.61,3720 4784.61,3880 5205,3900 4724.61,3910 3695,3945 4744.61,4059.35 3704.61,4175 4054.61,4185 4360,4195 4730,4195 4240,4200 3819.61,4290 4595,4315 3505.62,4438.38 4450,4455 3784.61,4525 5125,4525 4035,4710 5190,4765
  other v2: 4900.32,4480.31 4939.69,4480.31 4900.32,4519.68 4939.69,4519.68
IO0: Q4.3 R7.1 SW7.1 U10.27 | length 1315.7
  Top Layer w6: SW7.1@4203.19,4842.68 4203.19,4176.74 4295.09,4084.85 U10.27@4305.04,4084.85 4384.42,4084.85 R7.1@4389.61,4079.66 4414.66,4079.66 4435,4100 4753.98,4100 Q4.3@4789.61,4064.37
LRC: U8.1 U10.10 | length 315.4
  Top Layer w6: U10.10@3616.06,4284.85 3704.76,4284.85 3739.61,4250 3739.61,4155 3709.61,4125 v1(3669.61,4125)
RST: C11.2 Q5.3 R18.1 SW8.3 U10.3 | length 2171
  Top Layer w6: SW8.3@3621.03,4842.68 3382.29,4842.68 3345,4805.39 3345,4655 3385.34,4614.66 R18.1@3419.61,4614.66 3491.51,4614.66 C11.2@3494.29,4611.88 3593.08,4611.88 U10.3@3616.06,4634.85 4114.45,4634.85 4150.6,4598.7 4150.6,4187.82 4266.53,4071.9 4266.53,4058.09 4279.41,4045.2 4534.61,4045.2 Q5.3@4534.61,4064.37
RTS: Q5.2 R26.2 U44.14 | length 290.1
  Top Layer w6: U44.14@4404.61,3888.09 4404.61,3915 4428.85,3939.24 4525.62,3939.24 Q5.2@4572.01,3985.63 4592.64,3965 R26.2@4629.95,3965
RX: U10.19 U40.2 | length 1785.7
  Top Layer w6: U10.19@3885.55,4034.46 v1(3885.55,4270)
  Bottom Layer w6: v1(3885.55,4270) 3885.55,4635.55 4005,4755 4950,4755 U40.2@5000,4705
RXD: R27.2 U10.36 | length 889
  Top Layer w6: U10.36@4305.04,4534.85 4319.76,4534.85 v1(4469.61,4385)
  Bottom Layer w6: v1(4469.61,4385) 4469.61,4107.42 v1(4741.69,3835.34)
SCK: H2.3 U10.4 | length 1445.2
  Top Layer w6: v1(3369.61,4565) 3389.46,4584.85 U10.4@3616.06,4584.85
  Bottom Layer w6: v1(3369.61,4565) 3369.61,3820 3580.14,3609.47 H2.3@3727.98,3609.47
SD: H1.1 U10.6 | length 1152.3
  Top Layer w6: H1.1@3427.28,3607.33 3339.61,3695 3339.61,4420 3404.46,4484.85 U10.6@3616.06,4484.85
STBY: LED3.1 U2.5 | length 288.6
  Top Layer w6: LED3.1@4919.74,3383.52 4955.61,3419.38 4955.61,3648.76 U2.5@4949.61,3654.76
TX: U10.20 U40.3 | length 1692
  Top Layer w6: U10.20@3935.55,4034.46 v1(3935.55,4315)
  Bottom Layer w6: v1(3935.55,4315) 3935.55,4560.55 4080.2,4705.2 4799.8,4705.2 4900,4605 U40.3@5000,4605
TXD: R28.2 U10.37 | length 963.5
  Top Layer w6: U10.37@4305.04,4584.85 4409.76,4584.85 v1(4494.61,4500)
  Bottom Layer w6: v1(4494.61,4500) 4829.61,4165 v1@4829.61,3900
  other v1: 4829.61,3899.66
USB_D+: U43.A6 U43.B6 U44.5 | length 232.8
  Top Layer w6: U43.A6@4459.77,3572.44 4459.77,3525 4467.19,3517.58 4492.19,3517.58 4499.61,3525 4499.61,3571.97 U43.B6@4499.14,3572.44 4499.14,3656.44 U44.5@4504.61,3661.91
USB_D-: U43.A7 U43.B7 U44.6 | length 335.9
  Top Layer w6: U43.B7@4440.08,3572.39 4440.08,3600.47 4451.52,3611.91 4471.52,3611.91 ; U43.A7@4479.45,3572.39 4478.43,3573.42 4478.43,3606.19 4472.71,3611.91 4471.52,3611.91 ; U44.6@4554.61,3661.91 4554.61,3700 4529.61,3725 4499.61,3725 4479.28,3704.67 4479.28,3619.67 4471.52,3611.91
VBUS: C6.1 D10.2 R9.2 U2.4 U43.A4 U43.A9 U43.B4 U43.B9
  other v1: 4375.12,3572.28 4564.1,3572.44 4829.61,3584.66 4744.61,3602.44 4912.21,3654.76 4898.45,3885
VDD: Q2.2 SW6.3 | length 212.4
  Top Layer w30: Q2.2@4977.6,4038.46 5033.46,4038.46 5093.74,4098.74 SW6.3@5165,4098.74
WS: H2.2 U10.5 | length 1329.2
  Top Layer w6: 3544.61,4534.85 U10.5@3616.06,4534.85
  Bottom Layer w6: v1(3559.61,4535) 3550.37,4525.76 3550.37,3759.24 3554.61,3755 3724.61,3755 3794.61,3685 3794.61,3576.1 H2.2@3727.98,3509.47
WSDIN: LED1.4 U10.11 | length 359.5
  Top Layer w6: LED1.4@3380.56,4008.43 3389.63,4008.43 3514.61,4133.4 3514.61,4185 3564.46,4234.85 U10.11@3616.06,4234.85
pads on no net: LDO1.4 LED1.2 SW6.4 SW6.5 SW7.2 SW7.3 SW8.1 SW8.4 U8.4 U8.5 U10.7 U10.13 U10.14 U10.15 U10.16 U10.17 U10.18 U10.21 U10.22 U10.23 U10.24 U10.25 U10.26 U10.38 U10.39 U10.41 U43.A8 U43.B8 U44.7 U44.8 U44.9 U44.10 U44.11 U44.12 U44.15
copper on no net:
  other v3: 5164.61,3425 3434.61,4980 5164.61,4980

## Polygon pours and split planes (outlines as drawn)
GND on Top Layer (solid, remove dead copper, pour order 0): 3135,5225 5355,5225 5355,3000 3135,3000
GND on Bottom Layer (solid, remove dead copper, pour order 2): 3000,5425 5535,5425 5535,3070 3000,3070
VBUS on Inner1 (solid, remove dead copper): 4948.61,3925.39 5000,3874 5000,3520.78 4948.96,3469.74 4300.26,3469.74 4250,3520 4250,3865 4310.39,3925.39
5V on Inner1 (solid, remove dead copper): 3205,5200 5350,5200 5350,3240 3205,3240

## Keep-outs
Inner2:
  region: 4908.13,4515 4935,4515 4935,4486.38 4908.13,4486.38
Board Outline Layer:
  the board outline again, w10

## Other copper
Top Layer:
  region net 5V: 4887.4,4038.46 4917.4,4038.46 ccw(c5184.39,4000.85) 4914.76,4000.85 4885.24,4000.85 ccw(c4559.49,4038.46)
  region net $1N25046: 4890,4647.77 4900,4647.77 4900.29,4645.02 4901.06,4642.4 4902.15,4639.99 4903.41,4637.83 4905.75,4634.48 4906.52,4633.4 4906.81,4632.77 4883.19,4632.77 4883.48,4633.4 4884.25,4634.48 4886.59,4637.83 4887.85,4639.99 4888.94,4642.4 4889.71,4645.02
  region net $1N25046: 4900,4663.34 4890,4663.34 ccw(c4871.25,4663.34) 4882.5,4678.34 4907.5,4678.34 ccw(c4918.75,4663.34)
  region net $1N25048: 4940,4647.77 4950,4647.77 4950.29,4645.02 4951.06,4642.4 4952.15,4639.99 4953.41,4637.83 4955.75,4634.48 4956.52,4633.4 4956.81,4632.77 4933.19,4632.77 4933.48,4633.4 4934.25,4634.48 4936.59,4637.83 4937.85,4639.99 4938.94,4642.4 4939.71,4645.02
  region net $1N25048: 4954.47,4673.03 4942.59,4675.29 ccw(c4921.38,4691.2) 4947.89,4691.2 4970.38,4678.34 ccw(c4970.38,4651.82)
  region net $1N25048: 5037.89,4695.63 5037.89,4705.63 ccw(c5037.89,4724.38) 5052.89,4713.13 5052.89,4688.13 ccw(c5037.89,4676.88)
  region net $1N25048: 5017.11,4705.63 5017.11,4695.63 ccw(c5017.11,4676.88) 5002.11,4688.13 5002.11,4713.13 ccw(c5017.11,4724.38)
  region net $1N25043: 5057.87,4300 5057.87,4310 ccw(c5057.87,4328.75) 5072.87,4317.5 5072.87,4292.5 ccw(c5057.87,4281.25)
  region net $1N25043: 5051.66,4310 5051.66,4300 ccw(c5051.66,4281.25) 5036.66,4292.5 5036.66,4317.5 ccw(c5051.66,4328.75)
  region net $1N25043: 5000,4352.23 4990,4352.23 4989.71,4354.98 4988.94,4357.6 4987.85,4360.01 4986.59,4362.17 4984.25,4365.52 4983.48,4366.6 4983.19,4367.23 5006.81,4367.23 5006.52,4366.6 5005.75,4365.52 5003.41,4362.17 5002.15,4360.01 5001.06,4357.6 5000.29,4354.98
  region net $1N25043: 4990,4347.11 5000,4347.11 ccw(c5018.75,4347.11) 5007.5,4332.11 4992.08,4332.11 ccw(c4936.85,4332.11)
  region net IO0: 4414.66,4082.66 4414.66,4076.66 ccw(c4414.66,4067.23) 4406.62,4072.16 4406.62,4087.16 ccw(c4414.66,4092.09)
  region net IO0: 4771.1,4078.64 4767.84,4090.38 ccw(c4781.09,4103.63) 4775.83,4085.65 4775.83,4070.65 ccw(c4757.85,4065.39)
  region net 3.7V: 4932.5,4369.61 4957.5,4369.61 ccw(c6616.02,4369.61) 4957.92,4332.11 4913.75,4332.11 ccw(c4885.62,4369.61)
  region net 3.7V: 4952.5,4150.93 4927.5,4150.93 ccw(c4872.11,4150.93) 4912.87,4188.43 4968.39,4188.43 ccw(c5004.7,4150.93)
  region net 3.7V: 4890.69,4112.5 4890.69,4137.5 ccw(c4890.69,4498.41) 4928.19,4139.45 4928.19,4103.63 ccw(c4890.69,4028.82)
  region net 3.7V: 4665.49,4174.39 4665.49,4149.39 ccw(c4665.49,4102.52) 4627.99,4130.64 4627.99,4193.14 ccw(c4665.49,4221.27)
  region net SD: 3390.64,3639.73 3391.09,3647.77 ccw(c3400.63,3660.5) 3400.63,3644.59 3393.82,3630.19 ccw(c3377.91,3630.19)
  region net WSDIN: 3408.24,4031.27 3404.98,4019.53 ccw(c3418.23,4006.28) 3400.25,4011.54 3400.25,4026.54 ccw(c3394.99,4044.52)
  region net RST: 3467.57,4611.66 3467.57,4617.66 ccw(c3467.57,4628.91) 3476.57,4622.16 3476.57,4607.16 ccw(c3467.57,4600.41)
  region net RST: 3586.44,4839.68 3586.44,4845.68 ccw(c3586.44,4856.93) 3595.44,4850.18 3595.44,4835.18 ccw(c3586.44,4828.43)
  region net SD: 3577.53,4481.85 3577.53,4487.85 ccw(c3577.53,4499.1) 3586.53,4492.35 3586.53,4477.35 ccw(c3577.53,4470.6)
  region net RST: 3521.01,4614.88 3521.01,4608.88 ccw(c3521.01,4597.63) 3512.01,4604.38 3512.01,4619.38 ccw(c3521.01,4626.13)
  region net WS: 3576.14,4537.85 3575.91,4531.85 3574.4,4531.72 3573.18,4531.34 3572.17,4530.76 3571.29,4530 3569.61,4528.12 3567.5,4525.95 3567.73,4543.85 3569.8,4541.64 3571.49,4539.72 3572.39,4538.96 3573.41,4538.36 3574.63,4537.98
  region net WS: 3544.61,4531.85 3544.61,4537.85 3546.05,4537.98 3547.1,4538.36 3547.88,4538.96 3548.49,4539.72 3549.66,4541.64 3550.44,4542.73 3551.49,4543.85 3551.72,4525.95 3550.63,4527.05 3549.81,4528.12 3548.58,4530 3547.94,4530.76 3547.14,4531.34 3546.07,4531.72
  region net WS: 3577.53,4531.85 3577.53,4537.85 ccw(c3577.53,4549.1) 3586.53,4542.35 3586.53,4527.35 ccw(c3577.53,4520.6)
  region net WSDIN: 3577.53,4231.85 3577.53,4237.85 ccw(c3577.53,4249.1) 3586.53,4242.35 3586.53,4227.35 ccw(c3577.53,4220.6)
  region net RST: 3597.85,4612.4 3590.96,4614 ccw(c3589.45,4615.51) 3590.84,4617.13 3605.84,4617.13 ccw(c3611.1,4599.15)
  region net LRC: 3654.58,4287.85 3654.58,4281.85 ccw(c3654.58,4270.6) 3645.58,4277.35 3645.58,4292.35 ccw(c3654.58,4299.1)
  region net DIN: 3654.58,4387.85 3654.58,4381.85 ccw(c3654.58,4370.6) 3645.58,4377.35 3645.58,4392.35 ccw(c3654.58,4399.1)
  region net DIN: 3693.32,4381.85 3693.09,4387.85 3694.59,4387.98 3695.81,4388.36 3696.84,4388.96 3697.73,4389.72 3699.43,4391.64 3701.49,4393.85 3701.72,4375.95 3699.61,4378.12 3697.93,4380 3697.05,4380.76 3696.05,4381.34 3694.83,4381.72
  region net BCLK: 3654.58,4337.85 3654.58,4331.85 ccw(c3654.58,4320.6) 3645.58,4327.35 3645.58,4342.35 ccw(c3654.58,4349.1)
  region net BCLK: 3728.2,4331.85 3728.2,4337.85 3729.71,4337.98 3730.93,4338.36 3731.94,4338.95 3732.83,4339.71 3734.52,4341.61 3736.61,4343.8 3736.61,4325.9 3734.52,4328.08 3732.83,4329.99 3731.94,4330.75 3730.93,4331.34 3729.71,4331.71
  region net LRC: 3686.02,4128 3686.02,4122 3684.52,4121.87 3683.29,4121.49 3682.28,4120.9 3681.39,4120.14 3679.71,4118.23 3677.62,4116.05 3677.62,4133.95 3679.71,4131.77 3681.39,4129.86 3682.28,4129.1 3683.29,4128.51 3684.52,4128.13
  region net IO0: 4206.19,4819.9 4200.19,4819.9 ccw(c4188.94,4819.9) 4195.69,4828.9 4210.69,4828.9 ccw(c4217.44,4819.9)
  region net IO0: 4272.33,4103.37 4278.43,4105.75 ccw(c4287.98,4118.47) 4287.98,4102.56 4275.51,4093.82 ccw(c4259.6,4093.82)
  region net $1N17681: 4255.62,3463 4255.62,3457 ccw(c4255.62,3445.75) 4246.62,3452.5 4246.62,3467.5 ccw(c4255.62,3474.25)
  region net IO0: 4343.56,4087.85 4343.56,4081.85 ccw(c4343.56,4070.6) 4334.56,4077.35 4334.56,4092.35 ccw(c4343.56,4099.1)
  region net IO0: 4363.6,4081.85 4363.6,4087.85 ccw(c4363.6,4099.1) 4372.6,4092.35 4372.6,4077.35 ccw(c4363.6,4070.6)
  region net $1N18254: 4351.61,3702.32 4357.61,3702.32 4357.71,3701.13 4358,3699.91 4359.02,3697.45 4360.46,3695.17 4362.11,3693.32 4347.11,3693.32 4348.76,3695.17 4350.21,3697.45 4351.23,3699.91 4351.51,3701.13
  region net RST: 4511.83,4042.2 4511.83,4048.2 ccw(c4511.83,4059.45) 4520.83,4052.7 4520.83,4039.76 ccw(c4511.83,4024.36)
  region net RTS: 4411.4,3926.03 4418.08,3924.23 4417.3,3923.3 4416.6,3922.18 4415.54,3919.59 4415.2,3918.21 4415.03,3916.84 4415.04,3915.54 4415.24,3914.35 4402.48,3922.23 4404.9,3922.77 4407.28,3923.51 4409.49,3924.56 4410.49,3925.24
  region net $1N17681: 4423.4,3541 4417.4,3541 ccw(c4402.01,3541) 4414.5,3550 4426.31,3550 ccw(c4438.79,3541)
  region net $1N18255: 4414.77,3699.4 4418.85,3694.99 4418.08,3694.08 4417.42,3693.02 4416.4,3690.57 4415.8,3687.96 4415.63,3685.48 4405.19,3696.25 4407.67,3696.37 4410.31,3696.95 4412.79,3697.97 4413.86,3698.63
  region net USB_D-: 4437.08,3600.47 4443.08,3600.47 ccw(c4450.01,3600.47) 4445.99,3594.83 4434.18,3594.83 ccw(c4430.16,3600.47)
  region net DTR: 4457.61,3847.68 4451.61,3847.68 4451.51,3848.87 4451.23,3850.09 4450.21,3852.55 4448.76,3854.83 4447.11,3856.68 4462.11,3856.68 4460.46,3854.83 4459.02,3852.55 4458,3850.09 4457.71,3848.87
  region net USB_D+: 4462.77,3541 4456.77,3541 ccw(c4441.38,3541) 4453.87,3550 4465.68,3550 ccw(c4478.16,3541)
  region net USB_D-: 4453.46,3608.91 cw(c4453.46,3552.6) 4476.3,3604.07 4480.55,3608.31 cw(c4486.54,3612.41) 4481.4,3617.55 4477.16,3621.79 cw(c4452.28,3663.33) 4452.28,3614.91
  region net USB_D+: 4496.14,3603.88 4502.14,3603.88 ccw(c4517.53,3603.88) 4505.05,3594.88 4493.24,3594.88 ccw(c4480.75,3603.88)
  region net USB_D+: 4502.14,3618.85 4496.14,3626.29 4495.97,3628.68 4495.5,3630.85 4494.09,3635.29 4507.11,3627.85 4505.8,3627.37 4504.73,3626.62 4503.86,3625.64 4503.2,3624.48 4502.71,3623.18 4502.38,3621.78
  region net $1N18268: 4518.98,4011.64 4515.73,3999.9 ccw(c4528.97,3986.65) 4510.99,3991.91 4510.99,4006.91 ccw(c4505.74,4024.89)
  region net $1N17680: 4541.51,3541 4535.51,3541 ccw(c4520.12,3541) 4532.61,3550 4544.42,3550 ccw(c4556.9,3541)
  region net RTS: 4550.24,3959.62 4553.5,3971.36 ccw(c4540.25,3984.61) 4558.23,3979.35 4558.23,3964.35 ccw(c4563.49,3946.37)
  region net USB_D-: 4551.61,3700 4557.61,3700 4557.71,3698.92 4558,3697.95 4558.44,3697.09 4559.02,3696.29 4560.46,3694.81 4562.11,3693.32 4547.11,3693.32 4548.76,3694.81 4550.21,3696.29 4550.78,3697.09 4551.23,3697.95 4551.51,3698.92
  region net A4: 4343.56,4237.85 4343.56,4231.85 ccw(c4343.56,4220.6) 4334.56,4227.35 4334.56,4242.35 ccw(c4343.56,4249.1)
  region net A3: 4343.56,4287.85 4343.56,4281.85 ccw(c4343.56,4270.6) 4334.56,4277.35 4334.56,4292.35 ccw(c4343.56,4299.1)
  region net A3: 4831.05,4281.85 4825.14,4287.85 4826.5,4288 4827.8,4288.43 4829.04,4289.1 4830.19,4289.97 4831.23,4291 4832.14,4292.15 4832.92,4293.38 4833.54,4294.65 4841.22,4278.48 4838.85,4279.36 4836.18,4280.48 4833.5,4281.44 4832.23,4281.74
  region net $1N18254: 4715.68,3771.38 4715.68,3777.38 ccw(c4715.68,3788.63) 4724.68,3781.88 4724.68,3766.88 ccw(c4715.68,3760.13)
  region net $1N18268: 4605.08,4027 4605.08,4033 ccw(c4605.08,4044.25) 4614.08,4037.5 4614.08,4022.5 ccw(c4605.08,4015.75)
  region net RTS: 4605.08,3962 4605.08,3968 ccw(c4605.08,3979.25) 4614.08,3972.5 4614.08,3957.5 ccw(c4605.08,3950.75)
  region net $1N17680: 4708.6,3462 4708.6,3468 ccw(c4708.6,3479.25) 4717.6,3472.5 4717.6,3457.5 ccw(c4708.6,3450.75)
  region net $1N18267: 4714.15,3968 4714.15,3962 ccw(c4714.15,3950.75) 4705.15,3957.5 4705.15,3972.5 ccw(c4714.15,3979.25)
  region net DTR: 4714.15,4033 4714.15,4027 ccw(c4714.15,4015.75) 4705.15,4022.5 4705.15,4037.5 ccw(c4714.15,4044.25)
  region net $1N5755: 4735.26,4761.1 4735.26,4755.1 ccw(c4735.26,4743.85) 4726.26,4750.6 4726.26,4765.6 ccw(c4735.26,4772.35)
  region net $1N5755: 4757.06,4755.1 4757.06,4761.1 ccw(c4757.06,5060.07) 4766.06,4761.24 4766.06,4750.6 ccw(c4757.06,4743.85)
  region net $1N18267: 4733.7,3962.88 4733.7,3971.36 ccw(c4720.45,3984.61) 4738.43,3979.35 4738.43,3964.35 ccw(c4737.47,3959.11)
  region net DTR: 4816.7,3957.84 4810.05,3959.68 ccw(c4797.32,3969.23) 4813.23,3969.23 4826.24,3961.02 ccw(c4826.24,3945.11)
  region net DTR: 4808.5,3999.9 4805.24,4011.64 ccw(c4818.49,4024.89) 4813.23,4006.91 4813.23,3991.91 ccw(c4795.25,3986.65)
  region net $1N4920: 4832.61,3500.46 4826.61,3500.46 ccw(c4815.36,3500.46) 4822.11,3509.46 4837.11,3509.46 ccw(c4843.86,3500.46)
  region net $1N4920: 4826.61,3471.22 4832.61,3471.22 ccw(c4843.86,3471.22) 4837.11,3462.22 4822.11,3462.22 ccw(c4815.36,3471.22)
  region net $1N18255: 4832.61,3815.46 4826.61,3815.46 ccw(c4815.36,3815.46) 4822.11,3824.46 4837.11,3824.46 ccw(c4843.86,3815.46)
  region net A4: 4845.89,4209.48 4850.13,4213.73 4851.29,4212.76 4852.42,4212.16 4853.55,4211.85 4854.72,4211.77 4857.26,4211.92 4860.28,4211.99 4847.62,4199.33 4847.69,4202.35 4847.84,4204.89 4847.76,4206.06 4847.45,4207.19 4846.86,4208.32
  region net CHRG: 4848.67,3368.83 4844.43,3364.59 ccw(c4834.89,3351.86) 4834.89,3367.77 4845.49,3378.38 ccw(c4861.4,3378.38)
  region net BAT: 4877.33,3732.56 4877.33,3712.56 ccw(c4877.33,3631.4) 4847.33,3706.81 4847.33,3738.31 ccw(c4877.33,3813.72)
  region net $1N4920: 4894.73,3443.48 4894.73,3449.48 ccw(c4894.73,3460.73) 4903.73,3453.98 4903.73,3438.98 ccw(c4894.73,3432.23)
  region net BAT: 4896.6,3715.49 4889.24,3736.41 ccw(c4859.07,3766.58) 4901.74,3766.34 4922.68,3724.14 ccw(c4922.68,3680.49)
  region net STBY: 4934.43,3402.45 4938.67,3398.2 ccw(c4951.4,3388.66) 4935.49,3388.66 4924.89,3399.26 ccw(c4924.89,3415.18)
  region net STBY: 4958.61,3624.66 4952.61,3624.66 ccw(c4941.36,3624.66) 4948.11,3633.66 4960.08,3633.66 ccw(c4986.85,3624.66)
  region net $1N4911: 4990.01,3624.66 4984.01,3624.66 ccw(c4972.76,3624.66) 4979.51,3633.66 4994.51,3633.66 ccw(c5001.26,3624.66)
  region net $1N4911: 4984.01,3571.01 4990.01,3571.01 ccw(c5001.26,3571.01) 4994.51,3562.01 4979.51,3562.01 ccw(c4972.76,3571.01)
  region net CHRG: 5002.22,3734.27 5005.48,3722.53 ccw(c4992.23,3709.28) 4997.48,3727.27 4997.48,3742.27 ccw(c5015.47,3747.52)
  region net RST: 3445.62,4617.66 3445.62,4611.66 ccw(c3445.62,4600.41) 3436.62,4607.16 3436.62,4622.16 ccw(c3445.62,4628.91)
  region net RST: 3654.58,4637.85 3654.58,4631.85 ccw(c3654.58,4620.6) 3645.58,4627.35 3645.58,4642.35 ccw(c3654.58,4649.1)
  region net USB_D+: 4502.61,3541 4496.61,3541 ccw(c4482.93,3541) 4493.24,3550 4505.05,3550 ccw(c4520.46,3541)
  region net RTS: 4590.53,3971.36 4590.52,3962.88 ccw(c4586.76,3959.11) 4585.79,3964.35 4585.79,3979.35 ccw(c4603.77,3984.61)
  region net $1N4920: 4854.22,3449.48 4854.22,3443.48 ccw(c4854.22,3432.23) 4845.22,3438.98 4845.22,3453.98 ccw(c4854.22,3460.73)
  region net 5V: 4833.28,4620.76 4833.28,4595.76 ccw(c4833.28,4377.66) 4795.78,4592.52 4795.78,4624.01 ccw(c4833.28,4838.87)
  region net 5V: 4795.69,4595.76 4795.69,4620.76 4802.68,4620.51 4809.46,4620 4815.79,4619.62 4818.73,4619.59 4821.47,4619.74 4823.99,4620.1 4826.27,4620.73 4828.27,4621.68 4829.97,4622.99 4831.34,4624.7 4832.35,4626.87 4832.97,4629.55 4833.19,4632.77 4833.19,4585.53 4832.97,4588.73 4832.35,4591.35 4831.34,4593.44 4829.97,4595.04 4828.27,4596.21 4826.27,4597.01 4823.99,4597.48 4821.47,4597.68 4818.73,4597.66 4815.79,4597.47 4809.46,4596.8 4802.68,4596.09 4799.2,4595.85
  region net RX: 3882.55,4072.99 3888.55,4072.99 ccw(c3899.8,4072.99) 3893.05,4063.99 3878.05,4063.99 ccw(c3871.3,4072.99)
  region net TX: 3932.55,4072.99 3938.55,4072.99 ccw(c3949.8,4072.99) 3943.05,4063.99 3928.05,4063.99 ccw(c3921.3,4072.99)
  region net TX: 3938.55,4298.59 3932.55,4298.59 3932.41,4300.1 3932.04,4301.32 3931.45,4302.33 3930.69,4303.22 3928.78,4304.91 3926.6,4306.99 3944.5,4306.99 3942.31,4304.91 3940.41,4303.22 3939.65,4302.33 3939.06,4301.32 3938.68,4300.1
  region net RX: 3888.55,4253.59 3882.55,4253.59 3882.41,4255.1 3882.04,4256.32 3881.45,4257.33 3880.69,4258.22 3878.78,4259.91 3876.6,4261.99 3894.5,4261.99 3892.31,4259.91 3890.41,4258.22 3889.65,4257.33 3889.06,4256.32 3888.68,4255.1
  region net RXD: 4337.75,4521.11 4336.42,4513.95 ccw(c4326.87,4501.22) 4326.87,4517.13 4334.56,4530.65 ccw(c4350.47,4530.65)
  region net RXD: 4455.89,4394.48 4460.13,4398.73 4461.29,4397.76 4462.42,4397.16 4463.55,4396.85 4464.72,4396.77 4467.26,4396.92 4470.28,4396.99 4457.62,4384.33 4457.69,4387.35 4457.84,4389.89 4457.76,4391.06 4457.45,4392.19 4456.86,4393.32
  region net SCK: 3577.53,4581.85 3577.53,4587.85 ccw(c3577.53,4599.1) 3586.53,4592.35 3586.53,4577.35 ccw(c3577.53,4570.6)
  region net SCK: 3379.09,4578.73 3383.34,4574.48 3382.37,4573.32 3381.77,4572.19 3381.47,4571.06 3381.38,4569.89 3381.53,4567.35 3381.6,4564.33 3368.94,4576.99 3371.97,4576.92 3374.51,4576.77 3375.67,4576.85 3376.8,4577.16 3377.94,4577.76
  region net RST: 3393.6,4611.66 3393.6,4617.66 ccw(c3393.6,4628.91) 3402.6,4622.16 3402.6,4607.16 ccw(c3393.6,4600.41)
  region net $1N22811: 5058.78,3956.18 5058.78,3926.18 ccw(c5058.78,3552.1) 5013.78,3923.46 5013.78,3958.9 ccw(c5058.78,4330.26)
  region net $1N22811: 5124.06,3926.18 5123.94,3956.18 5126.48,3956.32 5129.25,3956.73 5132.14,3957.39 5135.06,3958.27 5137.89,3959.35 5140.55,3960.61 5142.94,3962.02 5144.94,3963.57 5145.06,3918.85 5143.05,3920.38 5140.66,3921.78 5138,3923.03 5135.16,3924.1 5132.25,3924.98 5129.36,3925.63 5126.6,3926.04
  region net BAT: 4968.82,3823.82 4968.82,3853.82 ccw(c4968.82,3910.91) 4986.22,3856.54 4986.22,3821.1 ccw(c4968.82,3766.73)
  region net ELEC: 5205,4035 5205,4005 5202.63,4004.84 5200.01,4004.4 5197.24,4003.71 5194.44,4002.79 5191.7,4001.69 5189.15,4000.44 5186.88,3999.08 5185,3997.64 5185,4042.36 5186.88,4040.92 5189.15,4039.56 5191.7,4038.31 5194.44,4037.21 5197.24,4036.29 5200.01,4035.6 5202.63,4035.16
  region net ELEC: 5196.89,3756.6 5218.11,3735.39 5216.41,3733.49 5214.74,3731.24 5213.16,3728.74 5211.72,3726.06 5210.48,3723.29 5209.48,3720.52 5208.79,3717.84 5208.46,3715.33 5176.84,3746.95 5179.35,3747.29 5182.03,3747.98 5184.8,3748.97 5187.56,3750.22 5190.24,3751.66 5192.75,3753.24 5195,3754.9
  region net VDD: 5033.46,4053.46 5033.46,4023.46 ccw(c5033.46,3689.02) 4989.41,4020.55 4989.41,4056.37 ccw(c5033.46,4387.9)
  region net VDD: 5124,4083.74 5124,4113.74 5126.54,4113.88 5129.31,4114.29 5132.2,4114.95 5135.11,4115.82 5137.95,4116.9 5140.61,4118.15 5142.99,4119.56 5145,4121.1 5145,4076.38 5142.99,4077.92 5140.61,4079.33 5137.95,4080.58 5135.11,4081.66 5132.2,4082.53 5129.31,4083.19 5126.54,4083.6
  region net AS-TXD: 3937.02,3866.65 3941.26,3862.4 ccw(c3953.99,3852.86) 3938.08,3852.86 3927.47,3863.46 ccw(c3927.47,3879.37)
  region net AS-TXD: 4280.54,3964.48 4280.54,3970.48 4282.05,3970.61 4283.27,3970.99 4284.29,3971.58 4285.17,3972.34 4286.86,3974.25 4288.95,3976.43 4288.95,3958.53 4286.86,3960.72 4285.17,3962.62 4284.29,3963.38 4283.27,3963.97 4282.05,3964.35
  region net TXD: 4343.56,4587.85 4343.56,4581.85 ccw(c4343.56,4570.6) 4334.56,4577.35 4334.56,4592.35 ccw(c4343.56,4599.1)
  region net TXD: 4480.89,4509.48 4485.13,4513.73 4486.29,4512.76 4487.42,4512.16 4488.55,4511.85 4489.72,4511.77 4492.26,4511.92 4495.28,4511.99 4482.62,4499.33 4482.69,4502.35 4482.84,4504.89 4482.76,4506.06 4482.45,4507.19 4481.86,4508.32